# Altium PCB AICat V1.6 双面板 板厚1.6mm.PcbDoc (part 6 of 6)
Units mil, origin at the board's own origin, x right, y up, seen from the top; angles counter-clockwise.
Board outline 2778 x 2104 mil, 2 copper layers (Top Layer, Bottom Layer); 123 components, 84 nets, 332 pads, 256 vias.
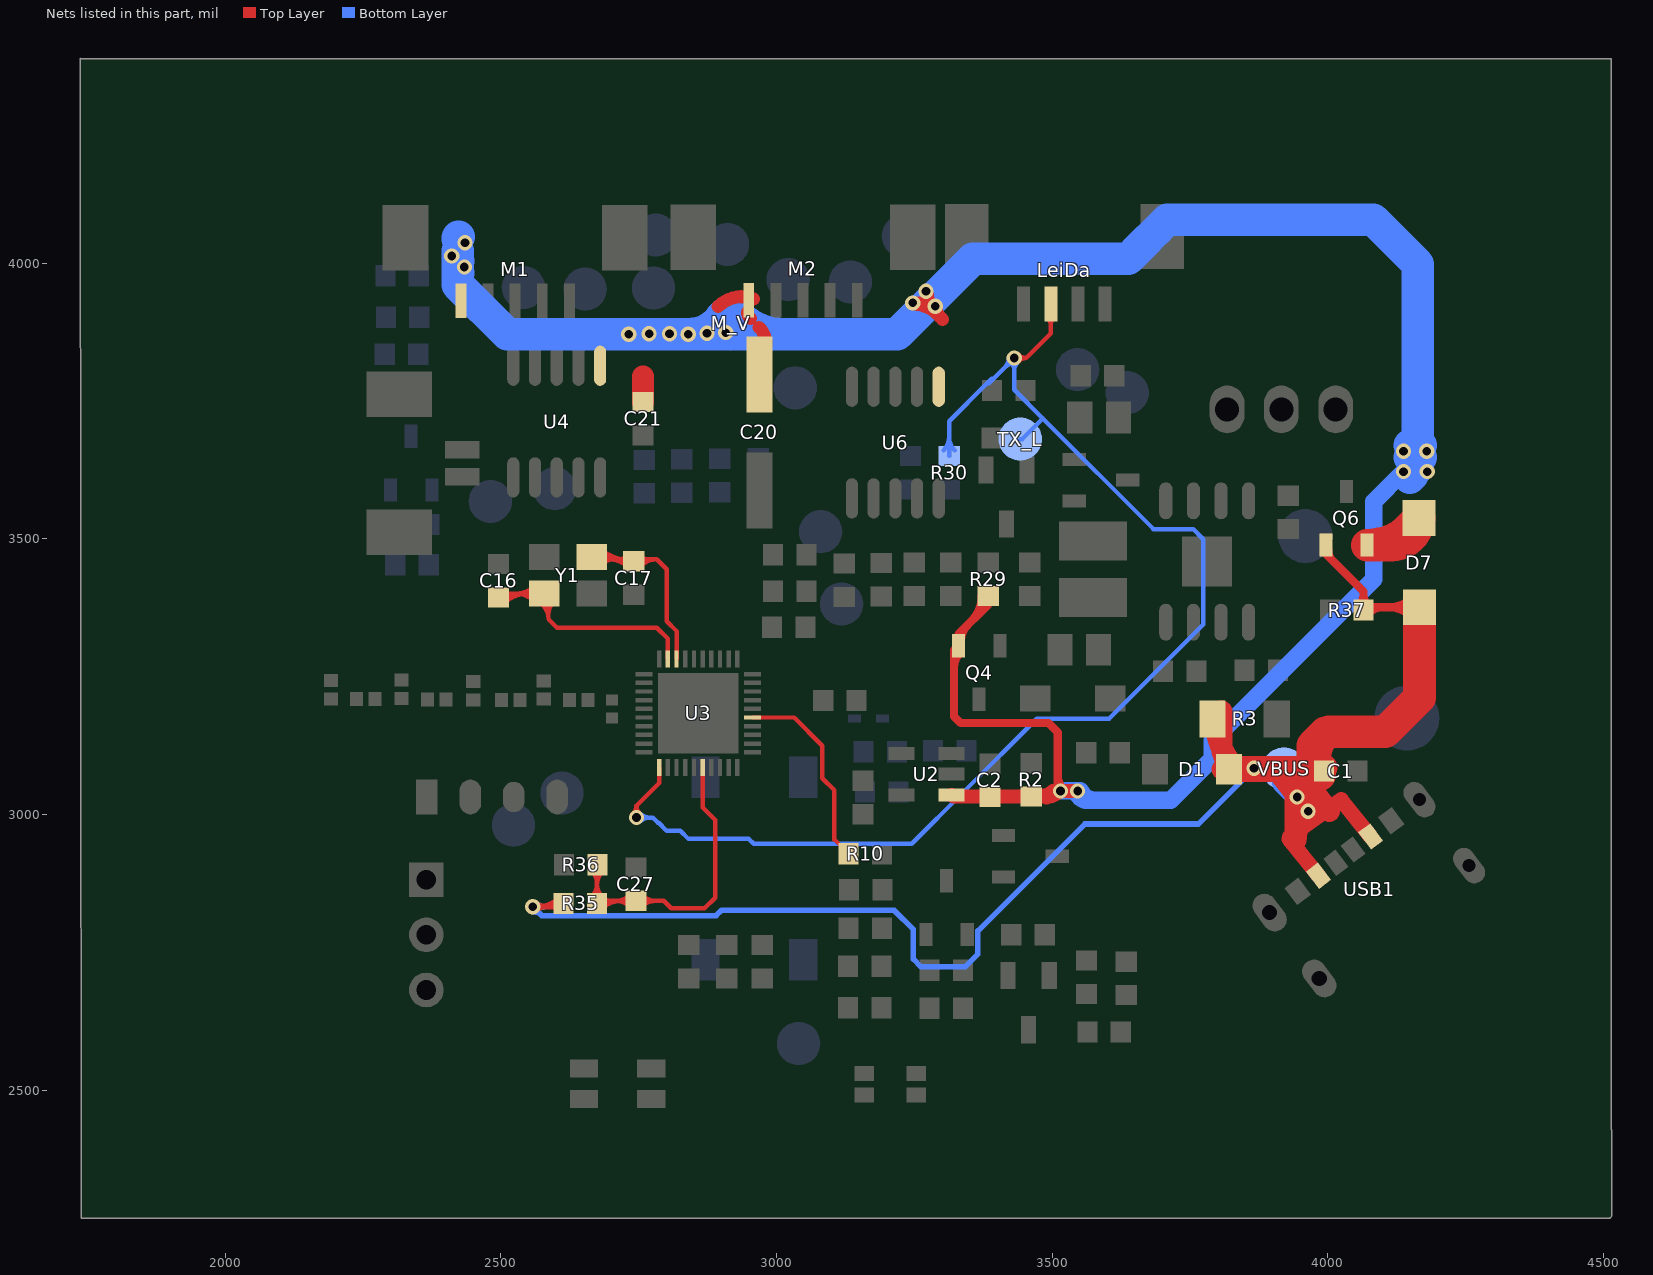
[diagram p6: the nets of this part, all layers, seen from the top]

## Via types
v1: diameter 27.56, hole 15.75, Top Layer to Bottom Layer, tented both sides, 256 vias

## Nets (pads, with @x,y where several pads share a name; then routed paths per layer and width w, separated by ;. In a path a pad name is that pad's centre, name@x,y a point inside that pad or via, vN(x,y) a via of type N, cw(c..) or ccw(c..) an arc to the next point about the centre after c; other vN are vias at no path point) (continued)
TX_LEIDA: LeiDa.3 R30.1 TX_L.1 U3.1 | length 3669.4
  Top Layer w8: v1(2746,2994.63) 2746,3016 ; U3.1@2787.28,3085.51 2787.28,3057.28 2746,3016 ; v1(3431,3828) 3453,3828 ; LeiDa.3@3497.39,3929.98 3497.39,3872.39 3453,3828 ; v1@2739.61,3002.03 ccw(c2727.54,3016) 2746,3016 ; v1@2739.61,3002.03 ccw(c2727.54,3016) 2746,3016 ; v1@2739.61,3002.03 ccw(c2727.54,3016) 2746,3016 ; v1@2739.61,3002.03 ccw(c2727.54,3016) 2746,3016 ; 2746,3016 ccw(c2764.46,3016) v1@2752.39,3002.03 ; 2746,3016 ccw(c2764.46,3016) v1@2752.39,3002.03 ; 2746,3016 ccw(c2764.46,3016) v1@2752.39,3002.03 ; 2746,3016 ccw(c2764.46,3016) v1@2752.39,3002.03 ; v1@3438.26,3821.45 cw(c3453,3808.15) 3453,3828 ; v1@3438.26,3821.45 cw(c3453,3808.15) 3453,3828 ; v1@3438.26,3821.45 cw(c3453,3808.15) 3453,3828 ; v1@3438.26,3821.45 cw(c3453,3808.15) 3453,3828 ; v1@3438.26,3821.45 cw(c3453,3808.15) 3453,3828 ; v1@3438.26,3834.55 ccw(c3453,3847.85) 3453,3828 ; v1@3438.26,3834.55 ccw(c3453,3847.85) 3453,3828 ; v1@3438.26,3834.55 ccw(c3453,3847.85) 3453,3828 ; v1@3438.26,3834.55 ccw(c3453,3847.85) 3453,3828 ; v1@3438.26,3834.55 ccw(c3453,3847.85) 3453,3828 ; LeiDa.3@3491.86,3904.77 cw(c3478.53,3891.44) 3497.38,3891.44 ; LeiDa.3@3491.86,3904.77 cw(c3478.53,3891.44) 3497.38,3891.44 ; LeiDa.3@3491.86,3904.77 cw(c3478.53,3891.44) 3497.38,3891.44 ; 3497.38,3887.44 ccw(c3478.53,3887.44) 3491.86,3900.77 cw(c3478.53,3887.44) 3497.38,3887.44 ; 3497.39,3887.44 cw(c3516.24,3887.44) 3502.91,3900.77 ccw(c3516.24,3887.44) 3497.39,3887.44 ; 3497.39,3891.44 cw(c3516.24,3891.44) LeiDa.3@3502.91,3904.77 ; 3497.39,3891.44 cw(c3516.24,3891.44) LeiDa.3@3502.91,3904.77 ; 3497.39,3891.44 cw(c3516.24,3891.44) LeiDa.3@3502.91,3904.77
  Bottom Layer w8: v1(2746,2994.63) 2775.74,2994.63 2784.96,2985.41 2786.26,2985.41 2800.67,2971 2825.37,2971 2840.37,2956 2949.75,2956 2958.75,2947 3245,2947 3339.93,3041.93 ; R30.1@3313,3650.31 3313,3713.29 3381.86,3782.14 ; 3332,3034 3339.93,3041.93 ; 3390.29,3790.57 3381.86,3782.14 ; TX_L.1@3442,3681 3445.46,3681 3482.86,3718.4 ; v1@2752.92,2987.71 cw(c2769.61,2971.02) 2769.61,2994.63 ; v1@2752.92,2987.71 cw(c2769.61,2971.02) 2769.61,2994.63 ; v1@2752.92,2987.71 cw(c2769.61,2971.02) 2769.61,2994.63 ; v1@2752.92,2987.71 cw(c2769.61,2971.02) 2769.61,2994.63 ; v1@2752.92,3001.55 ccw(c2769.61,3018.24) 2769.61,2994.63 ; v1@2752.92,3001.55 ccw(c2769.61,3018.24) 2769.61,2994.63 ; v1@2752.92,3001.55 ccw(c2769.61,3018.24) 2769.61,2994.63 ; v1@2752.92,3001.55 ccw(c2769.61,3018.24) 2769.61,2994.63 ; R30.1@3302.88,3660.43 ccw(c3278.46,3684.85) 3313,3684.85 ; R30.1@3302.88,3660.43 ccw(c3278.46,3684.85) 3313,3684.85 ; R30.1@3302.88,3660.43 ccw(c3278.46,3684.85) 3313,3684.85 ; R30.1@3302.88,3660.43 ccw(c3278.46,3684.85) 3313,3684.85 ; R30.1@3302.88,3660.43 ccw(c3278.46,3684.85) 3313,3684.85 ; 3313,3684.85 ccw(c3347.54,3684.85) R30.1@3323.12,3660.43 ; 3313,3684.85 ccw(c3347.54,3684.85) R30.1@3323.12,3660.43 ; 3313,3684.85 ccw(c3347.54,3684.85) R30.1@3323.12,3660.43 ; 3313,3684.85 ccw(c3347.54,3684.85) R30.1@3323.12,3660.43 ; 3313,3684.85 ccw(c3347.54,3684.85) R30.1@3323.12,3660.43 ; 3339.93,3041.93 3472,3174 3603,3174 3773.78,3344.78 3773.78,3499.51 3755.51,3517.78 3683.48,3517.78 3482.86,3718.4 ; 3381.86,3782.14 3385.14,3782.14 v1(3431,3828) 3431,3770.26 3482.86,3718.4 ; 3414.31,3811.31 cw(c3431,3794.61) v1@3431,3818.22 ; 3414.31,3811.31 ccw(c3397.61,3828) v1@3421.22,3828 ; 3414.31,3811.31 cw(c3431,3794.61) v1@3431,3818.22 ; 3414.31,3811.31 ccw(c3397.61,3828) v1@3421.22,3828 ; 3414.31,3811.31 ccw(c3397.61,3828) v1@3421.22,3828 ; 3414.31,3811.31 cw(c3431,3794.61) v1@3431,3818.22 ; 3414.31,3811.31 ccw(c3397.61,3828) v1@3421.22,3828 ; 3414.31,3811.31 cw(c3431,3794.61) v1@3431,3818.22 ; 3414.31,3811.31 ccw(c3397.61,3828) v1@3421.22,3828 ; 3414.31,3811.31 cw(c3431,3794.61) v1@3431,3818.22 ; v1@3424.08,3821.08 cw(c3407.39,3804.39) 3431,3804.39 ; v1@3424.08,3821.08 cw(c3407.39,3804.39) 3431,3804.39 ; v1@3424.08,3821.08 cw(c3407.39,3804.39) 3431,3804.39 ; v1@3424.08,3821.08 cw(c3407.39,3804.39) 3431,3804.39 ; v1@3424.08,3821.08 cw(c3407.39,3804.39) 3431,3804.39 ; 3431,3804.39 cw(c3454.61,3804.39) v1@3437.92,3821.08 ; 3431,3804.39 cw(c3454.61,3804.39) v1@3437.92,3821.08 ; 3431,3804.39 cw(c3454.61,3804.39) v1@3437.92,3821.08 ; 3431,3804.39 cw(c3454.61,3804.39) v1@3437.92,3821.08 ; 3431,3804.39 cw(c3454.61,3804.39) v1@3437.92,3821.08
USB_DEC: C27.2 R35.2 R36.1 U3.6 | length 1718.7
  Top Layer w8: R36.1@2675.31,2909 2674.32,2908 R35.2@2674.32,2839 2679,2843.69 C27.2@2745,2843.69 2795.31,2843.69 2809,2830 2869.41,2830 2888.78,2849.37 2888.78,2990.22 2866.02,3012.98 U3.6@2866.02,3085.51 ; R35.2@2664.2,2850.1 ccw(c2639.78,2874.52) 2674.32,2874.52 ; R35.2@2664.2,2850.1 ccw(c2639.78,2874.52) 2674.32,2874.52 ; R35.2@2664.2,2850.1 ccw(c2639.78,2874.52) 2674.32,2874.52 ; R35.2@2664.2,2850.1 ccw(c2639.78,2874.52) 2674.32,2874.52 ; R36.1@2665.2,2897.9 cw(c2643.18,2875.88) 2674.32,2875.88 ; R36.1@2665.2,2897.9 cw(c2643.18,2875.88) 2674.32,2875.88 ; R36.1@2665.2,2897.9 cw(c2643.18,2875.88) 2674.32,2875.88 ; R36.1@2665.2,2897.9 cw(c2643.18,2875.88) 2674.32,2875.88 ; 2674.32,2871.07 cw(c2712.26,2871.07) R36.1@2685.43,2897.9 ; 2674.32,2871.07 cw(c2712.26,2871.07) R36.1@2685.43,2897.9 ; 2674.32,2871.07 cw(c2712.26,2871.07) R36.1@2685.43,2897.9 ; 2674.32,2871.07 cw(c2712.26,2871.07) R36.1@2685.43,2897.9 ; 2674.32,2874.52 ccw(c2708.86,2874.52) R35.2@2684.43,2850.1 ; 2674.32,2874.52 ccw(c2708.86,2874.52) R35.2@2684.43,2850.1 ; 2674.32,2874.52 ccw(c2708.86,2874.52) R35.2@2684.43,2850.1 ; 2674.32,2874.52 ccw(c2708.86,2874.52) R35.2@2684.43,2850.1 ; R35.2@2678.78,2835.52 cw(c2698.48,2815.82) 2698.48,2843.69 ; R35.2@2678.78,2835.52 cw(c2698.48,2815.82) 2698.48,2843.69 ; R35.2@2678.78,2835.52 cw(c2698.48,2815.82) 2698.48,2843.69 ; R35.2@2678.78,2835.52 cw(c2698.48,2815.82) 2698.48,2843.69 ; R35.2@2684.43,2829.87 cw(c2717.79,2796.51) 2717.79,2843.69 ; R35.2@2684.43,2829.87 cw(c2717.79,2796.51) 2717.79,2843.69 ; R35.2@2684.43,2829.87 cw(c2717.79,2796.51) 2717.79,2843.69 ; R35.2@2684.43,2829.87 cw(c2717.79,2796.51) 2717.79,2843.69 ; R35.2@2684.43,2850.1 ccw(c2699.92,2865.59) 2699.92,2843.69 ; R35.2@2684.43,2850.1 ccw(c2699.92,2865.59) 2699.92,2843.69 ; R35.2@2684.43,2850.1 ccw(c2699.92,2865.59) 2699.92,2843.69 ; R35.2@2684.43,2850.1 ccw(c2699.92,2865.59) 2699.92,2843.69 ; 2709.48,2843.69 cw(c2709.48,2809.15) C27.2@2733.9,2833.57 ; 2709.48,2843.69 ccw(c2709.48,2878.23) C27.2@2733.9,2853.8 ; 2709.48,2843.69 cw(c2709.48,2809.15) C27.2@2733.9,2833.57 ; 2709.48,2843.69 ccw(c2709.48,2878.23) C27.2@2733.9,2853.8 ; 2709.48,2843.69 ccw(c2709.48,2878.23) C27.2@2733.9,2853.8 ; 2709.48,2843.69 cw(c2709.48,2809.15) C27.2@2733.9,2833.57 ; 2709.48,2843.69 ccw(c2709.48,2878.23) C27.2@2733.9,2853.8 ; 2709.48,2843.69 cw(c2709.48,2809.15) C27.2@2733.9,2833.57 ; C27.2@2756.1,2833.57 cw(c2780.52,2809.15) 2780.52,2843.69 ; C27.2@2756.1,2833.57 cw(c2780.52,2809.15) 2780.52,2843.69 ; C27.2@2756.1,2833.57 cw(c2780.52,2809.15) 2780.52,2843.69 ; C27.2@2756.1,2833.57 cw(c2780.52,2809.15) 2780.52,2843.69 ; C27.2@2756.1,2853.8 ccw(c2780.52,2878.23) 2780.52,2843.69 ; C27.2@2756.1,2853.8 ccw(c2780.52,2878.23) 2780.52,2843.69 ; C27.2@2756.1,2853.8 ccw(c2780.52,2878.23) 2780.52,2843.69 ; C27.2@2756.1,2853.8 ccw(c2780.52,2878.23) 2780.52,2843.69
V_BAT_CON: R10.2 U3.15 | length 378.3
  Top Layer w8: U3.15@2956.55,3176.04 3031.96,3176.04 3083,3125 3083,3066 3105,3044 3105,2980 ; 3105,2965 3105,2980 ; R10.2@3130.68,2929 3105,2954.68 3105,2980
VBUS_BAT: C2.2 C20.1 C21.2 D7.2 M1.5 M2.5 M_V.1 Q4.2 Q6.2 R2.1 R29.1 U2.1 U4.6 U6.6 | length 7350.6
  Top Layer w8: C21.2@2745.76,3748.31 C21.2@2758,3748.31
  Top Layer w15: R29.1@3384,3396.69 3384,3381 3330.12,3327.12 Q4.2@3330.12,3306.31 3322,3298.19 3322,3178 3334,3166 3493,3166 3510,3149 3510,3051.69 v1@3501.31,3043 ; 3322,3267.05 cw(c3360.12,3267.05) Q4.2@3333.17,3294.01 ; 3322,3267.05 cw(c3360.12,3267.05) Q4.2@3333.17,3294.01 ; 3322,3267.05 cw(c3360.12,3267.05) Q4.2@3333.17,3294.01 ; Q4.2@3334.43,3315.56 cw(c3372.74,3315.56) 3345.65,3342.65 ; Q4.2@3334.43,3315.56 cw(c3372.74,3315.56) 3345.65,3342.65 ; Q4.2@3334.43,3315.56 cw(c3372.74,3315.56) 3345.65,3342.65 ; 3352.78,3349.78 ccw(c3305.87,3396.69) R29.1@3372.21,3396.69 ; 3352.78,3349.78 ccw(c3305.87,3396.69) R29.1@3372.21,3396.69 ; 3352.78,3349.78 ccw(c3305.87,3396.69) R29.1@3372.21,3396.69 ; 3378.39,3375.39 ccw(c3357.09,3396.69) R29.1@3387.21,3396.69 ; 3378.39,3375.39 ccw(c3357.09,3396.69) R29.1@3387.21,3396.69 ; 3378.39,3375.39 ccw(c3357.09,3396.69) R29.1@3387.21,3396.69 ; 3510,3070.23 ccw(c3542.23,3070.23) v1@3519.44,3047.44 ; 3510,3070.23 ccw(c3542.23,3070.23) v1@3519.44,3047.44 ; 3510,3070.23 ccw(c3542.23,3070.23) v1@3519.44,3047.44
  Top Layer w20: C2.2@3381.56,3026.24 C2.2@3387,3031.69
  Top Layer w23.62: 2894.3,3921.3 cw(c2937.24,3878.35) M2.5@2958.55,3935.23 ; M2.5@2947.61,3911.26 ccw(c2964.19,3911.26) 2952.46,3899.54 ; 2968.44,3883.56 cw(c2938.6,3853.72) C20.1@2980.68,3850.47 ; 3269,3930 3301,3898 ; v1@3247,3926.03 cw(c3247,3863.34) 3291.33,3907.67 ; v1@3247,3926.03 cw(c3247,3863.34) 3291.33,3907.67 ; v1@3247,3926.03 cw(c3247,3863.34) 3291.33,3907.67 ; v1@3247.6,3926.12 cw(c3257.63,3894.63) v1@3281,3918 ; v1@3247.6,3926.12 cw(c3257.63,3894.63) v1@3281,3918 ; v1@3247.6,3926.12 cw(c3257.63,3894.63) v1@3281,3918 ; v1@3272.97,3949 ccw(c3328.42,3949) v1@3289.21,3909.79 ; v1@3272.97,3949 ccw(c3328.42,3949) v1@3289.21,3909.79 ; v1@3272.97,3949 ccw(c3328.42,3949) v1@3289.21,3909.79 ; v1@3289.93,3921.63 ccw(c3309.81,3917.81) 3295.5,3903.5 cw(c3309.81,3917.81) v1@3289.93,3921.63
  Top Layer w25: U2.1@3317.17,3035.93 3320.42,3032.69 R2.1@3462,3032.69 ; R2.1@3469,3032.69 R2.1@3462,3032.69 ; v1@3544,3043 v1(3515,3043) v1@3501.31,3043 ; R2.1@3462,3032.69 3491,3032.69 ; R2.1@3465.74,3037.8 ccw(c3480.03,3064.28) v1@3501.31,3043 ; R2.1@3465.74,3037.8 ccw(c3480.03,3064.28) v1@3501.31,3043 ; R2.1@3465.74,3037.8 ccw(c3480.03,3064.28) v1@3501.31,3043 ; 3487.01,3032.69 ccw(c3487.01,3070.99) v1@3514.1,3043.9 ; 3487.01,3032.69 ccw(c3487.01,3070.99) v1@3514.1,3043.9 ; 3487.01,3032.69 ccw(c3487.01,3070.99) v1@3514.1,3043.9 ; 3489.45,3031.14 cw(c3515,3005.59) v1@3515,3041.72 ; 3489.45,3031.14 cw(c3515,3005.59) v1@3515,3041.72 ; 3489.45,3031.14 cw(c3515,3005.59) v1@3515,3041.72 ; 3491,3032.69 ccw(c3491,3062.04) v1@3514,3043.8 ; 3491,3032.69 ccw(c3491,3062.04) v1@3514,3043.8 ; 3491,3032.69 ccw(c3491,3062.04) v1@3514,3043.8 ; 3491,3032.69 v1@3501.31,3043
  Top Layer w39.37: C21.2@2758,3748.31 2758,3795
  Top Layer w59.06: D7.2@4165,3537.94 4115.75,3488.69 ; Q6.2@4070.88,3488.69 ccw(c4070.89,3605.12) D7.2@4164.52,3535.93 ; Q6.2@4070.88,3488.69 ccw(c4070.89,3605.12) D7.2@4164.52,3535.93 ; Q6.2@4070.88,3488.69 ccw(c4070.89,3605.12) D7.2@4164.52,3535.93 ; Q6.2@4070.88,3488.69 4115.75,3488.69 ; 4115.75,3488.69 ccw(c4115.75,3537.38) D7.2@4164.41,3535.6 ; 4115.75,3488.69 ccw(c4115.75,3537.38) D7.2@4164.41,3535.6 ; 4115.75,3488.69 ccw(c4115.75,3537.38) D7.2@4164.41,3535.6
  Bottom Layer w31.5: v1@3514,3044 v1(3515,3043) v1(3546,3043) 3551,3043 3554,3040 3554,3036 3564,3026 ; v1(4137,3622) 4082.71,3567.71 4082.71,3426.71 3790,3134 3790,3101.34 3714.66,3026 3564,3026 ; v1@3544.06,3042.65 ccw(c3564,3046.26) 3564,3026 ; v1@3544.06,3042.65 ccw(c3564,3046.26) 3564,3026 ; v1@3544.06,3042.65 ccw(c3564,3046.26) 3564,3026 ; v1@3544.61,3041.61 ccw(c3582.29,3079.29) 3582.29,3026 ; v1@3544.61,3041.61 ccw(c3582.29,3079.29) 3582.29,3026 ; v1@3544.61,3041.61 ccw(c3582.29,3079.29) 3582.29,3026
  Bottom Layer w59.06: 2422,4022 2422,3961 2512,3871 2667,3871 ; 2591,3871 2667,3871 ; M_V.1@2900.97,3902.42 cw(c2840,3945.85) v1(2840,3871) ; M_V.1@2930.92,3904.92 ccw(c3012.81,3986.81) 3012.81,3871 ; 4163,3656 4163,3998 4082,4079 3709,4079 3690,4060 3661.53,4031.53 3637.7,4007.7 3396,4007.7 3355.7,4007.7 3219,3871 3195,3871 3146,3871 v1(2840,3871) ; 2422,4043.63 cw(c2428.37,4043.63) 2423.86,4048.14 ; 2422,4043.63 cw(c2428.37,4043.63) 2423.86,4048.14 ; 2422,4043.63 cw(c2428.37,4043.63) 2423.86,4048.14 ; 2422,4043.63 cw(c2428.37,4043.63) 2423.86,4048.14 ; 2667,3871 v1(2732,3871) ; 2667,3871 v1(2732,3871) ; v1(2732,3871) v1(2840,3871) ; 4148.14,3610.86 ccw(c4112.25,3646.75) 4163,3646.75 ; 4148.14,3610.86 ccw(c4112.25,3646.75) 4163,3646.75 ; 4148.14,3610.86 ccw(c4112.25,3646.75) 4163,3646.75 ; 4148.14,3610.86 ccw(c4112.25,3646.75) 4163,3646.75 ; 4148.14,3610.86 ccw(c4112.25,3646.75) 4163,3646.75 ; 4148.14,3610.86 ccw(c4112.25,3646.75) 4163,3646.75 ; 4148.14,3647.86 ccw(c4112.25,3683.75) 4163,3683.75 ; 4148.14,3647.86 ccw(c4112.25,3683.75) 4163,3683.75 ; 4148.14,3647.86 ccw(c4112.25,3683.75) 4163,3683.75 ; 4148.14,3670.14 cw(c4112.25,3634.25) 4163,3634.25 ; 4148.14,3670.14 cw(c4112.25,3634.25) 4163,3634.25 ; 4148.14,3670.14 cw(c4112.25,3634.25) 4163,3634.25 ; 4163,3658.39 cw(c4179.61,3658.39) 4167.86,3670.14 ; 4163,3658.39 cw(c4179.61,3658.39) 4167.86,3670.14 ; 4163,3658.39 cw(c4179.61,3658.39) 4167.86,3670.14 ; 4163,3659.61 ccw(c4179.61,3659.61) 4167.86,3647.86 ; 4163,3659.61 ccw(c4179.61,3659.61) 4167.86,3647.86 ; 4163,3659.61 ccw(c4179.61,3659.61) 4167.86,3647.86 ; 2422,3983.95 ccw(c2424.95,3983.95) 2422.86,3981.86 cw(c2424.95,3983.95) 2422,3983.95 ; 2422,4002.05 cw(c2424.95,4002.05) 2422.86,4004.14 ccw(c2424.95,4002.05) 2422,4002.05
  other v1: 4180,3622 4137,3659 4179,3659 2769,3872 2806,3872 2874,3873 2908,3874 3288,3922 3247,3928 3271,3949 2434,3993 2411,4013 2435,4037
VCC_USB: C1.2 D1.2 D7.1 Q6.1 R3.2 R35.1 R37.2 USB1.A9 USB1.B9 VBUS.1 | length 6298.8
  Top Layer w10: v1(2558,2833) 2607.69,2833 R35.1@2613.69,2839 ; v1@2564.21,2826.79 cw(c2579.2,2811.8) 2579.2,2833 ; v1@2564.21,2826.79 cw(c2579.2,2811.8) 2579.2,2833 ; v1@2564.21,2826.79 cw(c2579.2,2811.8) 2579.2,2833 ; v1@2564.21,2826.79 cw(c2579.2,2811.8) 2579.2,2833 ; v1@2564.21,2839.21 ccw(c2579.2,2854.2) 2579.2,2833 ; v1@2564.21,2839.21 ccw(c2579.2,2854.2) 2579.2,2833 ; v1@2564.21,2839.21 ccw(c2579.2,2854.2) 2579.2,2833 ; v1@2564.21,2839.21 ccw(c2579.2,2854.2) 2579.2,2833 ; v1@2569.45,2833 ccw(c2569.45,2882.25) R35.1@2604.28,2847.43 ; v1@2569.45,2833 ccw(c2569.45,2882.25) R35.1@2604.28,2847.43 ; v1@2569.45,2833 ccw(c2569.45,2882.25) R35.1@2604.28,2847.43 ; 2593.59,2833 ccw(c2593.59,2858.11) R35.1@2611.35,2840.35 ; 2593.59,2833 ccw(c2593.59,2858.11) R35.1@2611.35,2840.35 ; 2593.59,2833 ccw(c2593.59,2858.11) R35.1@2611.35,2840.35 ; 2593.67,2833 cw(c2593.67,2818) R35.1@2604.28,2828.61 ; 2593.67,2833 cw(c2593.67,2818) R35.1@2604.28,2828.61 ; 2593.67,2833 cw(c2593.67,2818) R35.1@2604.28,2828.61
  Top Layer w15: Q6.1@3996.08,3488.69 3996.08,3472.92 4064.32,3404.68 R37.2@4064.32,3371 4069.25,3375.94 D7.1@4166,3375.94 ; Q6.1@4000.39,3479.44 ccw(c4026.53,3479.44) 4008.05,3460.95 ; Q6.1@4000.39,3479.44 ccw(c4026.53,3479.44) 4008.05,3460.95 ; Q6.1@4000.39,3479.44 ccw(c4026.53,3479.44) 4008.05,3460.95 ; R37.2@4056.67,3379.63 ccw(c4038.23,3398.07) 4064.32,3398.07 ; R37.2@4056.67,3379.63 ccw(c4038.23,3398.07) 4064.32,3398.07 ; R37.2@4056.67,3379.63 ccw(c4038.23,3398.07) 4064.32,3398.07 ; 4064.32,3398.07 ccw(c4090.41,3398.07) R37.2@4071.96,3379.63 ; 4064.32,3398.07 ccw(c4090.41,3398.07) R37.2@4071.96,3379.63 ; 4064.32,3398.07 ccw(c4090.41,3398.07) R37.2@4071.96,3379.63 ; R37.2@4071.96,3364.34 cw(c4099.95,3336.35) 4099.95,3375.94 ; R37.2@4071.96,3364.34 cw(c4099.95,3336.35) 4099.95,3375.94 ; R37.2@4071.96,3364.34 cw(c4099.95,3336.35) 4099.95,3375.94 ; 4111.39,3375.94 cw(c4111.39,3321.33) D7.1@4150,3359.94 ; 4111.39,3375.94 ccw(c4111.39,3430.54) D7.1@4150,3391.93 ; 4111.39,3375.94 ccw(c4111.39,3430.54) D7.1@4150,3391.93 ; 4111.39,3375.94 cw(c4111.39,3321.33) D7.1@4150,3359.94 ; 4111.39,3375.94 ccw(c4111.39,3430.54) D7.1@4150,3391.93 ; 4111.39,3375.94 cw(c4111.39,3321.33) D7.1@4150,3359.94
  Top Layer w27.56: 3929.72,2955.9 USB1.B9@3982.82,2889.2 ; 3930.04,2959.98 4024.04,3026.98 USB1.A9@4077.14,2960.28 ; v1(3964,3006) ccw(c3974.03,3065.82) 4009.24,3016.43 cw(c3974.03,3065.82) v1(3964,3006) ; v1(3964,3006) cw(c3906.79,3014.42) 3940.35,2967.33 ccw(c3906.79,3014.42) v1(3964,3006)
  Top Layer w39.37: R3.2@3797,3168 ccw(c3911.29,3168) D1.2@3830.47,3087.19 ; R3.2@3807,3187.46 3807,3127 ; D1.2@3808.48,3082.37 3810.11,3084 D1.2@3825.48,3084 ; 3916.47,3068.83 3945.2,3032.96 3965.7,3007.36 v1@3970,3002 ; 3941.24,3082.37 3941.24,2953.3 3953.78,3066.72 3962.99,3055.22 3992,3019 ; R3.2@3788.37,3160.52 cw(c3761.1,3123.59) 3807,3123.59 ; R3.2@3788.37,3160.52 cw(c3761.1,3123.59) 3807,3123.59 ; R3.2@3788.37,3160.52 cw(c3761.1,3123.59) 3807,3123.59 ; 3807,3127 ccw(c3859.3,3127) D1.2@3823.2,3089.16 ; 3807,3127 ccw(c3859.3,3127) D1.2@3823.2,3089.16 ; 3807,3127 ccw(c3859.3,3127) D1.2@3823.2,3089.16 ; 3807,3128.36 ccw(c3862.54,3128.36) D1.2@3823.27,3089.09 ; 3807,3128.36 ccw(c3862.54,3128.36) D1.2@3823.27,3089.09 ; 3807,3128.36 ccw(c3862.54,3128.36) D1.2@3823.27,3089.09 ; v1@3941.6,3037.4 cw(c3956.77,3003.3) 3985.89,3026.63 ccw(c3956.77,3003.3) v1@3941.6,3037.4 ; v1@3944.65,3037.87 cw(c3935.21,2952.48) 4002.26,3006.19 ccw(c3935.21,2952.48) v1@3944.65,3037.87 ; 3951.07,3070.11 cw(c3882.3,3015.03) 3969.87,3005.35 ccw(c3882.3,3015.03) 3951.07,3070.11
  Top Layer w47.24: D1.2@3825.48,3082.37 3941.24,3082.37 3955.63,3082.37 3957,3081 3966,3090 3972,3090 C1.2@3975.69,3090 ; 3947.65,3071.65 cw(c3983.1,3036.2) C1.2@3993.82,3085.18 ; 3947.65,3071.65 cw(c3983.1,3036.2) C1.2@3993.82,3085.18 ; 3947.65,3071.65 cw(c3983.1,3036.2) C1.2@3993.82,3085.18
  Top Layer w59.06: 3972,3088.69 3972,3090 3972,3125 3995.2,3148.2 ; D7.1@4166,3375.94 4166,3212 4104,3150 4001.62,3150 3999.81,3148.2 3995.2,3148.2 ; 3972,3102.84 ccw(c4015.54,3102.84) C1.2@3984.75,3072.05 ; 3972,3102.84 ccw(c4015.54,3102.84) C1.2@3984.75,3072.05 ; 3972,3102.84 ccw(c4015.54,3102.84) C1.2@3984.75,3072.05 ; C1.2@3982.55,3075.18 cw(c4040.68,3102.71) 3995.19,3148.19 ; C1.2@3982.55,3075.18 cw(c4040.68,3102.71) 3995.19,3148.19 ; C1.2@3982.55,3075.18 cw(c4040.68,3102.71) 3995.19,3148.19
  Bottom Layer w10: v1(2558,2833) 2574.15,2816.85 2890.5,2816.85 2900.28,2826.63 3213.37,2826.63 3248,2792 3248,2738 3262,2724 3342,2724 3365,2747 3365,2789 3559,2983 3765,2983 v1(3866,3084) ; v1@2564.21,2826.79 cw(c2579.2,2811.8) 2579.2,2833 cw(c2579.2,2854.2) v1@2564.21,2839.21 ; VBUS.1@3918,3083 3917,3084 v1(3866,3084) ; v1@2558,2824.22 cw(c2558,2803.02) 2572.99,2818.01 ; v1@2558,2824.22 cw(c2558,2803.02) 2572.99,2818.01 ; v1@2558,2824.22 cw(c2558,2803.02) 2572.99,2818.01 ; v1@2566.78,2833 ccw(c2587.98,2833) 2572.99,2818.01 ; v1@2566.78,2833 ccw(c2587.98,2833) 2572.99,2818.01 ; v1@2566.78,2833 ccw(c2587.98,2833) 2572.99,2818.01 ; 3851.01,3069.01 cw(c3866,3054.02) v1@3866,3075.22 ; 3851.01,3069.01 ccw(c3836.02,3084) v1@3857.22,3084 ; 3851.01,3069.01 ccw(c3836.02,3084) v1@3857.22,3084 ; 3851.01,3069.01 cw(c3866,3054.02) v1@3866,3075.22 ; 3851.01,3069.01 ccw(c3836.02,3084) v1@3857.22,3084 ; 3851.01,3069.01 cw(c3866,3054.02) v1@3866,3075.22 ; v1(3866,3084) ccw(c3866,3110) 3889.26,3098.37 cw(c3866,3110) v1(3866,3084) ; v1(3866,3084) cw(c3866,3059.47) 3888.49,3069.27 ccw(c3866,3059.47) v1(3866,3084) ; VBUS.1@3887.2,3084 ccw(c3887.2,3062.8) 3872.21,3077.79 cw(c3887.2,3062.8) VBUS.1@3887.2,3084 ; VBUS.1@3887.2,3084 cw(c3887.2,3105.2) 3872.21,3090.21 ccw(c3887.2,3105.2) VBUS.1@3887.2,3084
  Bottom Layer w39.37: VBUS.1@3918,3083 3918,3058 v1@3967,3009 ; VBUS.1@3938.97,3077.73 ccw(c3993.57,3062.57) 3953.5,3022.5 cw(c3993.57,3062.57) VBUS.1@3938.97,3077.73
  other v1: 3944,3032
XC1: C16.2 U3.29 Y1.1 | length 1856.9
  Top Layer w8: C16.2@2496,3393.69 2502.93,3400.62 2586.56,3400.62 2586.56,3354.44 2602,3339 2783,3339 2803.03,3318.97 U3.29@2803.03,3282.31 ; C16.2@2501.44,3389.23 cw(c2528.94,3361.73) 2528.94,3400.62 ; C16.2@2501.44,3389.23 cw(c2528.94,3361.73) 2528.94,3400.62 ; C16.2@2501.44,3389.23 cw(c2528.94,3361.73) 2528.94,3400.62 ; C16.2@2501.44,3389.23 cw(c2528.94,3361.73) 2528.94,3400.62 ; C16.2@2501.44,3389.23 cw(c2528.94,3361.73) 2528.94,3400.62 ; C16.2@2507.1,3383.57 cw(c2548.26,3342.41) 2548.26,3400.62 ; C16.2@2507.1,3383.57 cw(c2548.26,3342.41) 2548.26,3400.62 ; C16.2@2507.1,3383.57 cw(c2548.26,3342.41) 2548.26,3400.62 ; C16.2@2507.1,3383.57 cw(c2548.26,3342.41) 2548.26,3400.62 ; C16.2@2507.1,3383.57 cw(c2548.26,3342.41) 2548.26,3400.62 ; C16.2@2507.1,3403.8 ccw(c2514.79,3411.49) C16.2@2514.79,3400.62 ; C16.2@2507.1,3403.8 ccw(c2514.79,3411.49) C16.2@2514.79,3400.62 ; C16.2@2507.1,3403.8 ccw(c2514.79,3411.49) C16.2@2514.79,3400.62 ; C16.2@2507.1,3403.8 ccw(c2514.79,3411.49) C16.2@2514.79,3400.62 ; C16.2@2507.1,3403.8 ccw(c2514.79,3411.49) C16.2@2514.79,3400.62 ; 2527.25,3400.62 cw(c2527.25,3353.25) Y1.1@2560.74,3386.74 ; 2527.25,3400.62 ccw(c2527.25,3447.99) Y1.1@2560.74,3414.49 ; 2527.25,3400.62 cw(c2527.25,3353.25) Y1.1@2560.74,3386.74 ; 2527.25,3400.62 ccw(c2527.25,3447.99) Y1.1@2560.74,3414.49 ; 2527.25,3400.62 ccw(c2527.25,3447.99) Y1.1@2560.74,3414.49 ; 2527.25,3400.62 cw(c2527.25,3353.25) Y1.1@2560.74,3386.74 ; 2527.25,3400.62 ccw(c2527.25,3447.99) Y1.1@2560.74,3414.49 ; 2527.25,3400.62 cw(c2527.25,3353.25) Y1.1@2560.74,3386.74 ; 2527.25,3400.62 ccw(c2527.25,3447.99) Y1.1@2560.74,3414.49 ; 2527.25,3400.62 cw(c2527.25,3353.25) Y1.1@2560.74,3386.74 ; 2546.56,3400.62 cw(c2546.56,3372.56) Y1.1@2566.4,3392.4 ; 2546.56,3400.62 ccw(c2546.56,3428.68) Y1.1@2566.4,3408.83 ; 2546.56,3400.62 cw(c2546.56,3372.56) Y1.1@2566.4,3392.4 ; 2546.56,3400.62 ccw(c2546.56,3428.68) Y1.1@2566.4,3408.83 ; 2546.56,3400.62 ccw(c2546.56,3428.68) Y1.1@2566.4,3408.83 ; 2546.56,3400.62 cw(c2546.56,3372.56) Y1.1@2566.4,3392.4 ; 2546.56,3400.62 ccw(c2546.56,3428.68) Y1.1@2566.4,3408.83 ; 2546.56,3400.62 cw(c2546.56,3372.56) Y1.1@2566.4,3392.4 ; 2546.56,3400.62 ccw(c2546.56,3428.68) Y1.1@2566.4,3408.83 ; 2546.56,3400.62 cw(c2546.56,3372.56) Y1.1@2566.4,3392.4 ; Y1.1@2571,3384.72 cw(c2548.98,3354.27) 2586.56,3354.27 ; Y1.1@2571,3384.72 cw(c2548.98,3354.27) 2586.56,3354.27 ; Y1.1@2571,3384.72 cw(c2548.98,3354.27) 2586.56,3354.27 ; Y1.1@2571,3384.72 cw(c2548.98,3354.27) 2586.56,3354.27 ; Y1.1@2571,3384.72 cw(c2548.98,3354.27) 2586.56,3354.27 ; Y1.1@2575.68,3391.2 cw(c2560.3,3369.92) 2586.56,3369.92 ; Y1.1@2575.68,3391.2 cw(c2560.3,3369.92) 2586.56,3369.92 ; Y1.1@2575.68,3391.2 cw(c2560.3,3369.92) 2586.56,3369.92 ; Y1.1@2575.68,3391.2 cw(c2560.3,3369.92) 2586.56,3369.92 ; Y1.1@2575.68,3391.2 cw(c2560.3,3369.92) 2586.56,3369.92 ; 2586.56,3363.05 cw(c2620.06,3363.05) Y1.1@2596.37,3386.74 ; 2586.56,3363.05 cw(c2620.06,3363.05) Y1.1@2596.37,3386.74 ; 2586.56,3363.05 cw(c2620.06,3363.05) Y1.1@2596.37,3386.74 ; 2586.56,3363.05 cw(c2620.06,3363.05) Y1.1@2596.37,3386.74 ; 2586.56,3363.05 cw(c2620.06,3363.05) Y1.1@2596.37,3386.74
XC2: C17.2 U3.28 Y1.3 | length 1590.3
  Top Layer w8: Y1.3@2673.18,3467.55 2677.72,3463 2783,3463 ; U3.28@2818.78,3282.31 2818.78,3332.78 2801,3350.56 2801,3445 2783,3463 ; Y1.3@2677.33,3475.76 ccw(c2708.15,3506.58) 2708.15,3463 ; Y1.3@2677.33,3475.76 ccw(c2708.15,3506.58) 2708.15,3463 ; Y1.3@2677.33,3475.76 ccw(c2708.15,3506.58) 2708.15,3463 ; Y1.3@2677.33,3475.76 ccw(c2708.15,3506.58) 2708.15,3463 ; Y1.3@2677.33,3475.76 ccw(c2708.15,3506.58) 2708.15,3463 ; Y1.3@2682.99,3453.67 cw(c2705.51,3431.15) 2705.51,3463 ; Y1.3@2682.99,3453.67 cw(c2705.51,3431.15) 2705.51,3463 ; Y1.3@2682.99,3453.67 cw(c2705.51,3431.15) 2705.51,3463 ; Y1.3@2682.99,3453.67 cw(c2705.51,3431.15) 2705.51,3463 ; Y1.3@2682.99,3453.67 cw(c2705.51,3431.15) 2705.51,3463 ; Y1.3@2682.99,3481.42 ccw(c2727.46,3525.9) C17.2@2727.46,3463 ; Y1.3@2682.99,3481.42 ccw(c2727.46,3525.9) C17.2@2727.46,3463 ; Y1.3@2682.99,3481.42 ccw(c2727.46,3525.9) C17.2@2727.46,3463 ; Y1.3@2682.99,3481.42 ccw(c2727.46,3525.9) C17.2@2727.46,3463 ; Y1.3@2682.99,3481.42 ccw(c2727.46,3525.9) C17.2@2727.46,3463 ; 2696.58,3463 cw(c2696.58,3415.87) C17.2@2729.9,3449.2 ; 2696.58,3463 cw(c2696.58,3415.87) C17.2@2729.9,3449.2 ; 2696.58,3463 cw(c2696.58,3415.87) C17.2@2729.9,3449.2 ; 2696.58,3463 cw(c2696.58,3415.87) C17.2@2729.9,3449.2 ; 2696.58,3463 cw(c2696.58,3415.87) C17.2@2729.9,3449.2 ; 2714.37,3463 ccw(c2714.37,3484.96) C17.2@2729.9,3469.43 ; 2714.37,3463 ccw(c2714.37,3484.96) C17.2@2729.9,3469.43 ; 2714.37,3463 ccw(c2714.37,3484.96) C17.2@2729.9,3469.43 ; 2714.37,3463 ccw(c2714.37,3484.96) C17.2@2729.9,3469.43 ; 2714.37,3463 ccw(c2714.37,3484.96) C17.2@2729.9,3469.43 ; 2715.89,3463 cw(c2715.89,3435.19) C17.2@2735.56,3454.85 ; 2715.89,3463 cw(c2715.89,3435.19) C17.2@2735.56,3454.85 ; 2715.89,3463 cw(c2715.89,3435.19) C17.2@2735.56,3454.85 ; 2715.89,3463 cw(c2715.89,3435.19) C17.2@2735.56,3454.85 ; 2715.89,3463 cw(c2715.89,3435.19) C17.2@2735.56,3454.85 ; C17.2@2746.62,3455.04 cw(c2764.76,3438.35) 2764.76,3463 ; C17.2@2746.62,3455.04 cw(c2764.76,3438.35) 2764.76,3463 ; C17.2@2746.62,3455.04 cw(c2764.76,3438.35) 2764.76,3463 ; C17.2@2746.62,3455.04 cw(c2764.76,3438.35) 2764.76,3463 ; C17.2@2746.62,3455.04 cw(c2764.76,3438.35) 2764.76,3463 ; C17.2@2752.1,3469.43 ccw(c2767.63,3484.96) 2767.63,3463 ; C17.2@2752.1,3469.43 ccw(c2767.63,3484.96) 2767.63,3463 ; C17.2@2752.1,3469.43 ccw(c2767.63,3484.96) 2767.63,3463 ; C17.2@2752.1,3469.43 ccw(c2767.63,3484.96) 2767.63,3463 ; C17.2@2752.1,3469.43 ccw(c2767.63,3484.96) 2767.63,3463 ; C17.2@2752.51,3449.63 cw(c2783,3421.57) 2783,3463 ; C17.2@2752.51,3449.63 cw(c2783,3421.57) 2783,3463 ; C17.2@2752.51,3449.63 cw(c2783,3421.57) 2783,3463 ; C17.2@2752.51,3449.63 cw(c2783,3421.57) 2783,3463 ; C17.2@2752.51,3449.63 cw(c2783,3421.57) 2783,3463
pads on no net: M1.6 M1.7 M2.6 M2.7 U1.6 U2.4 U3.33 U3.35 U3.36 U3.37

## Polygon pours and split planes (outlines as drawn)
GND on Top Layer "Bottom Layer-No Net" (solid, remove dead copper, pour order 1001): 2168.77,4122.65 2169.06,4122.38 2169.06,2540.36 2169.27,2540.36 2262.76,2455.82 2319.16,2404.82 3712.51,2404.82 3988.97,2404.82 4516.45,2881.82 4519.77,2884.82 4519.77,2954.82 4519.77,3028.82 4307.45,3220.82 4306.98,3221.25 4306.98,4122.65
GND on Top Layer "Bottom Layer-No Net" (solid, remove dead copper, pour order 1000): 2169,3288.5 2169.05,3288.45 2169.05,3053 2217.5,3053 2264.2,3099.7 2328.41,3163.91 2729,3163.91 2729,3222.89 2686.26,3265.63 2474,3265.63 2335.27,3265.63 2253.1,3347.8 2250.5,3350.4 2177.4,3350.4
no net on Top Layer "Bottom Layer-No Net" (solid, remove dead copper, pour order 1001): 2119.21,3679.47 1906.61,3679.47 1906.61,3565.29 2044.4,3565.29 2044.4,3496.4 1906.61,3496.4 1906.61,3382.22 2044.4,3382.22 2044.4,3313.33 1906.61,3313.33 1906.61,3105.45 2169.6,3105.45 2169.6,3129.07 1930.23,3129.07 1930.23,3197.97 2169.6,3197.97 2169.6,3221.2 1930.23,3221.2 1930.23,3290.1 2068.03,3290.1 2068.03,3404.27 1930.23,3404.27 1930.23,3473.17 2068.03,3473.17 2068.03,3587.34 1930.23,3587.34 1930.23,3656.24 2119.21,3656.24 2119.21,3679.47
GND on Bottom Layer "Bottom Layer-No Net" (solid, remove dead copper, pour order 1001): 2168.77,4122.65 2169.06,4122.38 2169.06,2540.36 2169.27,2540.36 2262.76,2455.82 2319.16,2404.82 3712.51,2404.82 3988.97,2404.82 4516.45,2881.82 4519.77,2884.82 4519.77,2954.82 4519.77,3028.82 4307.45,3220.82 4306.98,3221.25 4306.98,4122.65

## Keep-outs
Keep-Out Layer:
  circle w1: c3806.48,2666.13 r31.5
  circle w1: c3984.28,3217.31 r31.5
  circle w1: c3669.32,2902.35 r53.15
  circle w1: c3944.91,3965.34 r53.15
  circle w1: c1976.41,2862.98 r53.15
  circle w1: c1976.41,3965.34 r53.15
  lines w1: 4102.58,4122.82 1818.74,4122.82 ; 4330.72,2908.85 4102.58,2728.33 cw(c3241.48,3926.4) 4062.83,2700.74 cw(c3234.47,3936.82) 3989.17,2654.44 3967.69,2642.03 3951.64,2633.07 3937.34,2625.29 3924.85,2618.66 3914.2,2613.11 3903.48,2607.63 cw(c3181.32,4034.61) 3835.44,2575.19 3812.72,2565.21 3794.9,2557.68 3778.99,2551.15 3765.05,2545.59 3752.05,2540.54 3740.02,2535.97 3727.88,2531.47 3714.52,2526.63 3699.9,2521.47 3684,2516.03 3666.78,2510.31 3648.2,2504.37 3627.06,2497.86 3603.27,2490.87 3575.54,2483.16 3554.79,2477.68 3546.19,2475.48 3537.55,2473.32 3527.64,2470.89 3517.69,2468.5 3506.45,2465.87 3495.17,2463.29 3482.57,2460.5 3468.66,2457.51 3453.41,2454.35 3435.55,2450.8 3413.75,2446.68 3381.53,2441.01 3354.33,2436.62 3346.54,2435.43 3337.45,2434.07 3328.35,2432.76 3319.25,2431.47 3310.14,2430.23 3299.73,2428.85 3289.32,2427.52 3278.9,2426.24 3267.19,2424.85 3254.19,2423.37 3241.2,2421.97 3226.92,2420.51 3210.09,2418.9 3190.72,2417.18 3163.72,2415.04 3138.16,2413.28 3119.1,2412.13 3102.65,2411.25 3087.52,2410.53 3073.69,2409.94 3061.15,2409.48 3049.9,2409.11 3038.67,2408.78 3028.71,2408.54 3018.76,2408.32 3008.83,2408.14 3000.16,2408.02 2991.5,2407.92 2982.85,2407.84 2975.44,2407.79 2968.05,2407.77 2960.66,2407.76 2953.27,2407.77 2945.87,2407.79 2938.47,2407.84 2929.82,2407.92 2921.15,2408.02 2912.48,2408.14 2902.55,2408.32 2892.61,2408.54 2882.65,2408.78 2871.41,2409.11 2860.16,2409.48 2847.62,2409.94 2833.8,2410.53 2818.67,2411.25 2802.21,2412.13 2783.15,2413.28 2757.6,2415.04 2730.6,2417.18 2711.23,2418.9 2694.39,2420.51 2680.12,2421.97 2667.13,2423.37 2654.12,2424.85 2642.41,2426.24 2632,2427.52 2621.59,2428.85 2611.17,2430.23 2602.07,2431.47 2592.96,2432.76 2583.86,2434.07 2574.77,2435.43 2566.98,2436.62 2539.79,2441.01 2507.56,2446.68 2485.76,2450.8 2467.9,2454.35 2452.66,2457.51 2438.74,2460.5 2426.15,2463.29 2414.86,2465.87 2403.62,2468.5 2393.67,2470.89 2383.76,2473.32 2375.12,2475.48 2366.52,2477.68 2345.77,2483.16 2318.04,2490.87 2294.25,2497.86 2273.11,2504.37 2254.54,2510.31 2237.32,2516.03 2221.41,2521.47 2206.8,2526.63 2193.43,2531.47 2181.3,2535.97 2169.27,2540.54 2156.27,2545.59 2142.33,2551.15 2126.41,2557.68 2108.6,2565.21 2085.88,2575.19 cw(c2739.99,4034.61) 2017.83,2607.63 2007.11,2613.11 1996.46,2618.66 1983.97,2625.29 1969.68,2633.07 1953.62,2642.03 1932.15,2654.44 cw(c2686.85,3936.82) 1858.48,2700.74 cw(c2679.84,3926.4) 1818.74,2728.33 1818.74,4122.82 ; 4330.71,2909.39 4330.71,4122.82 1818.74,4122.82

## Other copper
Top Layer:
  rectangle net GND: 3372,4089 3955,4107
  rectangle net GND: 3352,3870 3415,4108
  rectangle net GND: 3980.85,3695 4046.85,3777
  rectangle net VBUS_BAT: 3229,3914 3325,3960
  rectangle net VCC_USB: 3976.97,3037.76 3996,3064
  rectangle net VBUS_BAT: 3284,3749 3326,3936
  rectangle net VBUS_BAT: 2669,3777 2973,3954
  rectangle net VBUS_BAT: 2399,3879 2449,4052
  rectangle net GND: 3669,3405 3952,3507
  rectangle net NetBAT1_2: 3883,3692 3947,3778
  rectangle net GND: 2169.15,3053 2211,3142.18
  rectangle net GND: 2212,3730 2445,3801
  rectangle net GND: 3530,3899 3561,4106
  rectangle net BAT+: 3784,3695 3850,3777
  rectangle net GND: 3061.95,3166.85 3074.96,3175.71
  rectangle net VBUS_BAT: 4123,3499 4208,3676
  rectangle net GND: 3530,3864.97 3561.17,3899
  rectangle net NetANT1_1: 2165.1,3197.7 2187.9,3221.2
Bottom Layer:
  rectangle net GND: 3980.43,3696 4045.43,3776
  rectangle net GND: 3980.43,3690 4045.43,3780
  rectangle net BAT+: 3783,3691 3849,3781
  rectangle net NetBAT1_2: 3882,3690 3947,3780.53

## Silkscreen, mask and mechanical layers (free items; w line width, h text height)
Top Overlay:
  circle w1: c1977,2862 r108.27
  circle w1: c1973,3965 r108.27
  circle w20: c2491,3569 r10
  circle w20: c3109,3519 r10
  circle w1: c3943,3968 r108.27
  circle w1: c3673,2903 r108.27
  lines w1: 2276.41,4122.82 2276.41,3965.34 2488.22,3965.34 2488.22,4122.82 ; 2527.59,4122.82 2527.59,3965.34 2921.29,3965.34 2921.29,4122.82 ; 2960.66,4122.82 2960.66,3965.34 3283.06,3965.34 3283.06,4122.82 ; 3314.99,4122.82 3314.99,3965.34 3708.69,3965.34 3708.69,4122.82 ; 3854.07,2946.64 4089.77,2637.71 ; 3861.38,2852.68 4049.08,2606.66 4329.22,2820.4 4141.51,3066.42 ; 4052.82,3098.28 4288.53,2789.35 ; 2645.7,2457.47 2645.7,2567.7 2783.49,2567.7 2783.49,2457.47 2645.7,2457.47 ; 3137.82,2457.47 3137.82,2567.7 3275.62,2567.7 3275.62,2457.47 3137.82,2457.47
  text "B+" at 3750,3857 h60 r180
  text "+5v" at 3599,3853 h30
  text "B-" at 3983,3848 h60 r180
  text "NTC" at 3878,3796 h30
  text "+" at 2495,3655 h30 r90
  text "GND" at 2414,3100 h30
  text "3V3" at 2307,3098 h30
  text "3V3" at 2437,2876 h30
  text "SWS" at 2433,2772 h30
  text "GND" at 2430,2662 h30
  text "G" at 2589,2468 h30
Bottom Overlay:
  circle w1: c2960.66,2902.35 r68.9
  lines w1: 2842.55,2784.24 3078.77,2784.24 3078.77,3020.46 2842.55,3020.46 2842.55,2784.24
  text "B+" at 3826,3805 h30
  text "B-" at 4038,3804 h30
  text "NTC" at 3953,3800 h30
  text "Yellow" at 3904,3678 h30 r90
  text "Black" at 4042,3678 h30 r90
  text "Red" at 3814,3669 h30 r90
  text "-" at 3118.3,3191.1 h30 r180
  text "+" at 3235.2,3164.9 h30 r90
Top Solder:
  lines w27.56: 3922,2888 3943,2863 ; 3963,2915 3984,2890 ; 4055,2989 4076,2964 ; 4092,3015 4113,2990